# EAGLE board AAT1217_BREAKOUT_pnl (EAGLE 7.2.0)
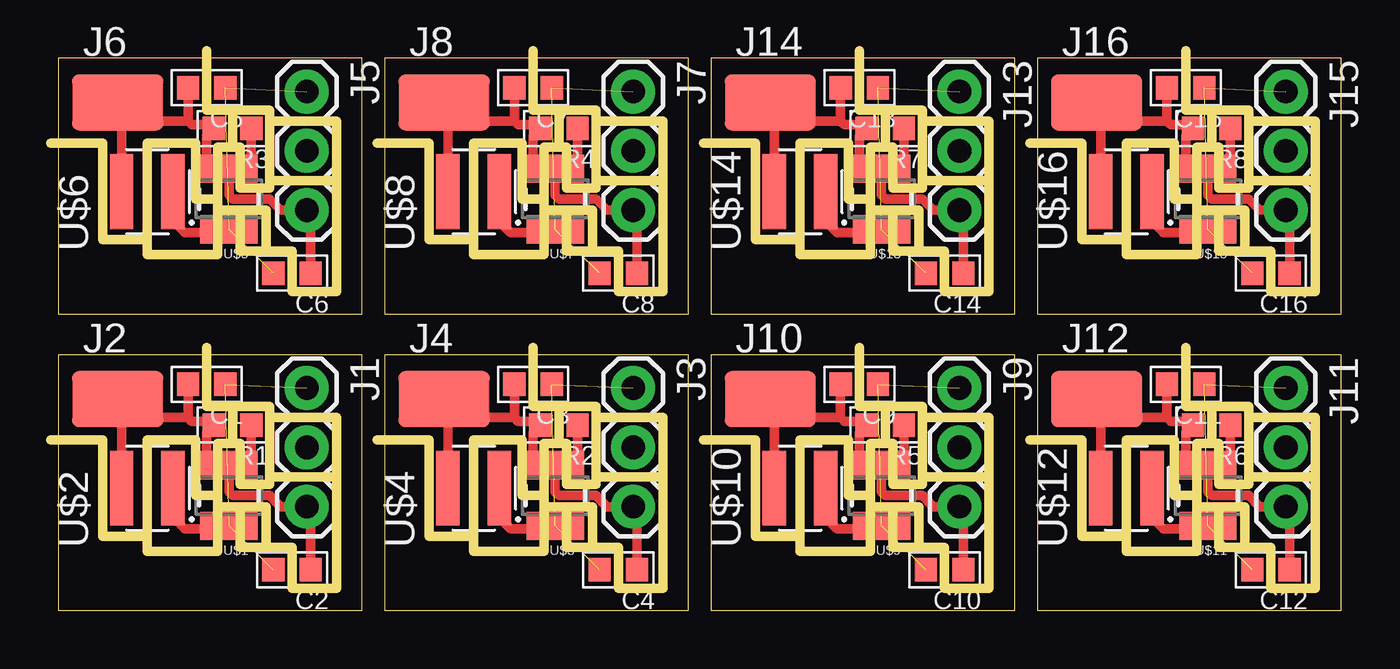
[diagram p0: board, top side]

Size 54.91 x 23.64 mm. Coordinates in mm from the lower left corner, seen from the top.
Outline: 0,0 13.01,0 13.01,10.94 0,10.94 0,0
Outline: 13.97,0 26.98,0 26.98,10.94 13.97,10.94 13.97,0
Outline: 0,12.7 13.01,12.7 13.01,23.64 0,23.64 0,12.7
Outline: 13.97,12.7 26.98,12.7 26.98,23.64 13.97,23.64 13.97,12.7
Outline: 27.94,0 40.95,0 40.95,10.94 27.94,10.94 27.94,0
Outline: 41.91,0 54.91,0 54.91,10.94 41.91,10.94 41.91,0
Outline: 27.94,12.7 40.95,12.7 40.95,23.64 27.94,23.64 27.94,12.7
Outline: 41.91,12.7 54.91,12.7 54.91,23.64 41.91,23.64 41.91,12.7
Copper layers (1*16): Top 0.035mm / dielectric 1.5mm / Bottom 0.035mm
Design rules "default": minimum track width 10mil, minimum drill 24mil, track to track 8mil, track to pad 8mil, pad to pad 8mil, via to via 8mil, smd to smd 8mil, copper to edge 40mil, drill to drill 8mil, minimum pad ring 10mil, minimum via ring 8mil, stop-mask expansion 4mil, vias tented up to drill 0mil, thermal gap 10mil
Milling: 280 lines

## Footprints (pad centres in the part's own frame; a part is rotated, then mirrored left to right if it is on the bottom)
C0603-N = smd 0.95 x 1: 1 -0.8,0; 2 0.8,0
1X03 = drill 1.016 pad 1.88: 1 0,0; 2 2.54,0; 3 5.08,0
LUXEON-PAD = smd 3.9 x 2.4: P$1 0,0
R0603-N = smd 0.95 x 1: 1 -0.8,0; 2 0.8,0
SOT23-6 = smd 0.55 x 1.2: 1 0.95,1.3; 2 0,1.3; 3 -0.95,1.3; 4 -0.95,-1.3; 5 0,-1.3; 6 0.95,-1.3
WURTH_10UH_650MA = smd 3.2 x 1: P$1 0,-1.1; P$2 0,1.1

## Placement (x,y rotation side)
C1  [C0603-N]  6.35,9.68 180 top
C2  [C0603-N]  10,1.75 180 top
C3  [C0603-N]  20.32,9.68 180 top
C4  [C0603-N]  23.97,1.75 180 top
C5  [C0603-N]  6.35,22.38 180 top
C6  [C0603-N]  10,14.45 180 top
C7  [C0603-N]  20.32,22.38 180 top
C8  [C0603-N]  23.97,14.45 180 top
C9  [C0603-N]  34.29,9.68 180 top
C10  [C0603-N]  37.94,1.75 180 top
C11  [C0603-N]  48.26,9.68 180 top
C12  [C0603-N]  51.91,1.75 180 top
C13  [C0603-N]  34.29,22.38 180 top
C14  [C0603-N]  37.94,14.45 180 top
C15  [C0603-N]  48.26,22.38 180 top
C16  [C0603-N]  51.91,14.45 180 top
J1  [1X03]  10.64,9.53 270 top
J2  [LUXEON-PAD]  2.54,9.05 0 top
J3  [1X03]  24.61,9.53 270 top
J4  [LUXEON-PAD]  16.51,9.05 0 top
J5  [1X03]  10.64,22.23 270 top
J6  [LUXEON-PAD]  2.54,21.75 0 top
J7  [1X03]  24.61,22.23 270 top
J8  [LUXEON-PAD]  16.51,21.75 0 top
J9  [1X03]  38.58,9.53 270 top
J10  [LUXEON-PAD]  30.48,9.05 0 top
J11  [1X03]  52.55,9.53 270 top
J12  [LUXEON-PAD]  44.45,9.05 0 top
J13  [1X03]  38.58,22.23 270 top
J14  [LUXEON-PAD]  30.48,21.75 0 top
J15  [1X03]  52.55,22.23 270 top
J16  [LUXEON-PAD]  44.45,21.75 0 top
R1  [R0603-N]  7.46,7.94 180 top
R2  [R0603-N]  21.43,7.94 180 top
R3  [R0603-N]  7.46,20.64 180 top
R4  [R0603-N]  21.43,20.64 180 top
R5  [R0603-N]  35.4,7.94 180 top
R6  [R0603-N]  49.37,7.94 180 top
R7  [R0603-N]  35.4,20.64 180 top
R8  [R0603-N]  49.37,20.64 180 top
U$1  AAT1217  [SOT23-6]  7.3,4.92 180 top
U$2  INDUCTORS_WURTH  [WURTH_10UH_650MA]  3.81,5.24 90 top
U$3  AAT1217  [SOT23-6]  21.27,4.92 180 top
U$4  INDUCTORS_WURTH  [WURTH_10UH_650MA]  17.78,5.24 90 top
U$5  AAT1217  [SOT23-6]  7.3,17.62 180 top
U$6  INDUCTORS_WURTH  [WURTH_10UH_650MA]  3.81,17.94 90 top
U$7  AAT1217  [SOT23-6]  21.27,17.62 180 top
U$8  INDUCTORS_WURTH  [WURTH_10UH_650MA]  17.78,17.94 90 top
U$9  AAT1217  [SOT23-6]  35.24,4.92 180 top
U$10  INDUCTORS_WURTH  [WURTH_10UH_650MA]  31.75,5.24 90 top
U$11  AAT1217  [SOT23-6]  49.21,4.92 180 top
U$12  INDUCTORS_WURTH  [WURTH_10UH_650MA]  45.72,5.24 90 top
U$13  AAT1217  [SOT23-6]  35.24,17.62 180 top
U$14  INDUCTORS_WURTH  [WURTH_10UH_650MA]  31.75,17.94 90 top
U$15  AAT1217  [SOT23-6]  49.21,17.62 180 top
U$16  INDUCTORS_WURTH  [WURTH_10UH_650MA]  45.72,17.94 90 top

## Library data of the parts
C1-C16 R1-R8 = passives-7351
J1-J16 = SparkFun-Connectors
U$1-U$16 = _my-parts

## Nets
GND: C1.1 C2.2 J1.1 U$1.2
GND1: C3.1 C4.2 J3.1 U$3.2
GND2: C5.1 C6.2 J5.1 U$5.2
GND3: C7.1 C8.2 J7.1 U$7.2
GND4: C9.1 C10.2 J9.1 U$9.2
GND5: C11.1 C12.2 J11.1 U$11.2
GND6: C13.1 C14.2 J13.1 U$13.2
GND7: C15.1 C16.2 J15.1 U$15.2
N$1: R1.1 U$1.4
N$2: C1.2 J2.P$1 R1.2 U$1.6 U$2.P$2
N$3: R2.1 U$3.4
N$4: U$1.1 U$2.P$1
N$5: C3.2 J4.P$1 R2.2 U$3.6 U$4.P$2
N$6: U$3.1 U$4.P$1
N$7: J3.2
N$8: J1.2
N$9: R3.1 U$5.4
N$10: C5.2 J6.P$1 R3.2 U$5.6 U$6.P$2
N$11: U$5.1 U$6.P$1
N$12: J5.2
N$13: R4.1 U$7.4
N$14: C7.2 J8.P$1 R4.2 U$7.6 U$8.P$2
N$15: U$7.1 U$8.P$1
N$16: J7.2
N$17: R5.1 U$9.4
N$18: C9.2 J10.P$1 R5.2 U$9.6 U$10.P$2
N$19: U$9.1 U$10.P$1
N$20: J9.2
N$21: R6.1 U$11.4
N$22: C11.2 J12.P$1 R6.2 U$11.6 U$12.P$2
N$23: U$11.1 U$12.P$1
N$24: J11.2
N$25: R7.1 U$13.4
N$26: C13.2 J14.P$1 R7.2 U$13.6 U$14.P$2
N$27: U$13.1 U$14.P$1
N$28: J13.2
N$29: R8.1 U$15.4
N$30: C15.2 J16.P$1 R8.2 U$15.6 U$16.P$2
N$31: U$15.1 U$16.P$1
N$32: J15.2
VOUT: C2.1 J1.3 U$1.5
VOUT1: C4.1 J3.3 U$3.5
VOUT2: C6.1 J5.3 U$5.5
VOUT3: C8.1 J7.3 U$7.5
VOUT4: C10.1 J9.3 U$9.5
VOUT5: C12.1 J11.3 U$11.5
VOUT6: C14.1 J13.3 U$13.5
VOUT7: C16.1 J15.3 U$15.5

## Tracks (layer width: path | path; a pad name or v marks a point on that pad's centre or on a via)
GND  (3 unrouted)
GND1  (3 unrouted)
GND2  (3 unrouted)
GND3  (3 unrouted)
GND4  (3 unrouted)
GND5  (3 unrouted)
GND6  (3 unrouted)
GND7  (3 unrouted)
N$1
  Top 0.406: U$1.4 R1.1
N$2
  Top 0.406: U$1.6 6.35,7.63 R1.2 6.5,8.1 5.71,8.1 5.55,8.26 | C1.2 5.55,8.26 | U$2.P$2 2.71,8.57 | 2.71,8.57 2.71,8.88 J2.P$1 | 5.55,8.26 3.02,8.26 2.71,8.57
N$3
  Top 0.406: U$3.4 R2.1
N$4
  Top 0.406: U$2.P$1 4.91,3.98 5.4,3.49 6.22,3.49 U$1.1
N$5
  Top 0.406: U$3.6 20.32,7.63 R2.2 20.47,8.1 19.68,8.1 19.52,8.26 | C3.2 19.52,8.26 | U$4.P$2 16.68,8.57 | 16.68,8.57 16.68,8.88 J4.P$1 | 19.52,8.26 16.99,8.26 16.68,8.57
N$6
  Top 0.406: U$4.P$1 18.88,3.98 19.37,3.49 20.19,3.49 U$3.1
N$9
  Top 0.406: U$5.4 R3.1
N$10
  Top 0.406: U$5.6 6.35,20.33 R3.2 6.5,20.8 5.71,20.8 5.55,20.96 | C5.2 5.55,20.96 | U$6.P$2 2.71,21.27 | 2.71,21.27 2.71,21.58 J6.P$1 | 5.55,20.96 3.02,20.96 2.71,21.27
N$11
  Top 0.406: U$6.P$1 4.91,16.68 5.4,16.19 6.22,16.19 U$5.1
N$13
  Top 0.406: U$7.4 R4.1
N$14
  Top 0.406: U$7.6 20.32,20.33 R4.2 20.47,20.8 19.68,20.8 19.52,20.96 | C7.2 19.52,20.96 | U$8.P$2 16.68,21.27 | 16.68,21.27 16.68,21.58 J8.P$1 | 19.52,20.96 16.99,20.96 16.68,21.27
N$15
  Top 0.406: U$8.P$1 18.88,16.68 19.37,16.19 20.19,16.19 U$7.1
N$17
  Top 0.406: U$9.4 R5.1
N$18
  Top 0.406: U$9.6 34.29,7.63 R5.2 34.44,8.1 33.66,8.1 33.49,8.26 | C9.2 33.49,8.26 | U$10.P$2 30.65,8.57 | 30.65,8.57 30.65,8.88 J10.P$1 | 33.49,8.26 30.96,8.26 30.65,8.57
N$19
  Top 0.406: U$10.P$1 32.85,3.98 33.34,3.49 34.16,3.49 U$9.1
N$21
  Top 0.406: U$11.4 R6.1
N$22
  Top 0.406: U$11.6 48.26,7.63 R6.2 48.41,8.1 47.62,8.1 47.46,8.26 | C11.2 47.46,8.26 | U$12.P$2 44.62,8.57 | 44.62,8.57 44.62,8.88 J12.P$1 | 47.46,8.26 44.93,8.26 44.62,8.57
N$23
  Top 0.406: U$12.P$1 46.82,3.98 47.31,3.49 48.13,3.49 U$11.1
N$25
  Top 0.406: U$13.4 R7.1
N$26
  Top 0.406: U$13.6 34.29,20.33 R7.2 34.44,20.8 33.66,20.8 33.49,20.96 | C13.2 33.49,20.96 | U$14.P$2 30.65,21.27 | 30.65,21.27 30.65,21.58 J14.P$1 | 33.49,20.96 30.96,20.96 30.65,21.27
N$27
  Top 0.406: U$14.P$1 32.85,16.68 33.34,16.19 34.16,16.19 U$13.1
N$29
  Top 0.406: U$15.4 R8.1
N$30
  Top 0.406: U$15.6 48.26,20.33 R8.2 48.41,20.8 47.62,20.8 47.46,20.96 | C15.2 47.46,20.96 | U$16.P$2 44.62,21.27 | 44.62,21.27 44.62,21.58 J16.P$1 | 47.46,20.96 44.93,20.96 44.62,21.27
N$31
  Top 0.406: U$16.P$1 46.82,16.68 47.31,16.19 48.13,16.19 U$15.1
VOUT
  Top 0.406: C2.1 10.8,4.28 J1.3 9.53,4.45 9.05,4.92 7.46,4.92 7.3,5.08 U$1.5
VOUT1
  Top 0.406: C4.1 24.77,4.28 J3.3 23.5,4.45 23.02,4.92 21.43,4.92 21.27,5.08 U$3.5
VOUT2
  Top 0.406: C6.1 10.8,16.98 J5.3 9.53,17.14 9.05,17.62 7.46,17.62 7.3,17.78 U$5.5
VOUT3
  Top 0.406: C8.1 24.77,16.98 J7.3 23.5,17.14 23.02,17.62 21.43,17.62 21.27,17.78 U$7.5
VOUT4
  Top 0.406: C10.1 38.74,4.28 J9.3 37.47,4.45 36.99,4.92 35.4,4.92 35.24,5.08 U$9.5
VOUT5
  Top 0.406: C12.1 52.71,4.28 J11.3 51.44,4.45 50.96,4.92 49.37,4.92 49.21,5.08 U$11.5
VOUT6
  Top 0.406: C14.1 38.74,16.98 J13.3 37.47,17.14 36.99,17.62 35.4,17.62 35.24,17.78 U$13.5
VOUT7
  Top 0.406: C16.1 52.71,16.98 J15.3 51.44,17.14 50.96,17.62 49.37,17.62 49.21,17.78 U$15.5